# Altium PCB LM2596.PcbDoc
Units mm, origin at the board's own origin, x right, y up, seen from the top; angles counter-clockwise.
Board outline 43.5 x 27.5 mm, 2 copper layers (Top Layer, Bottom Layer), stack 1.571 mm thick; 7 components, 5 nets, 26 pads, 32 vias.
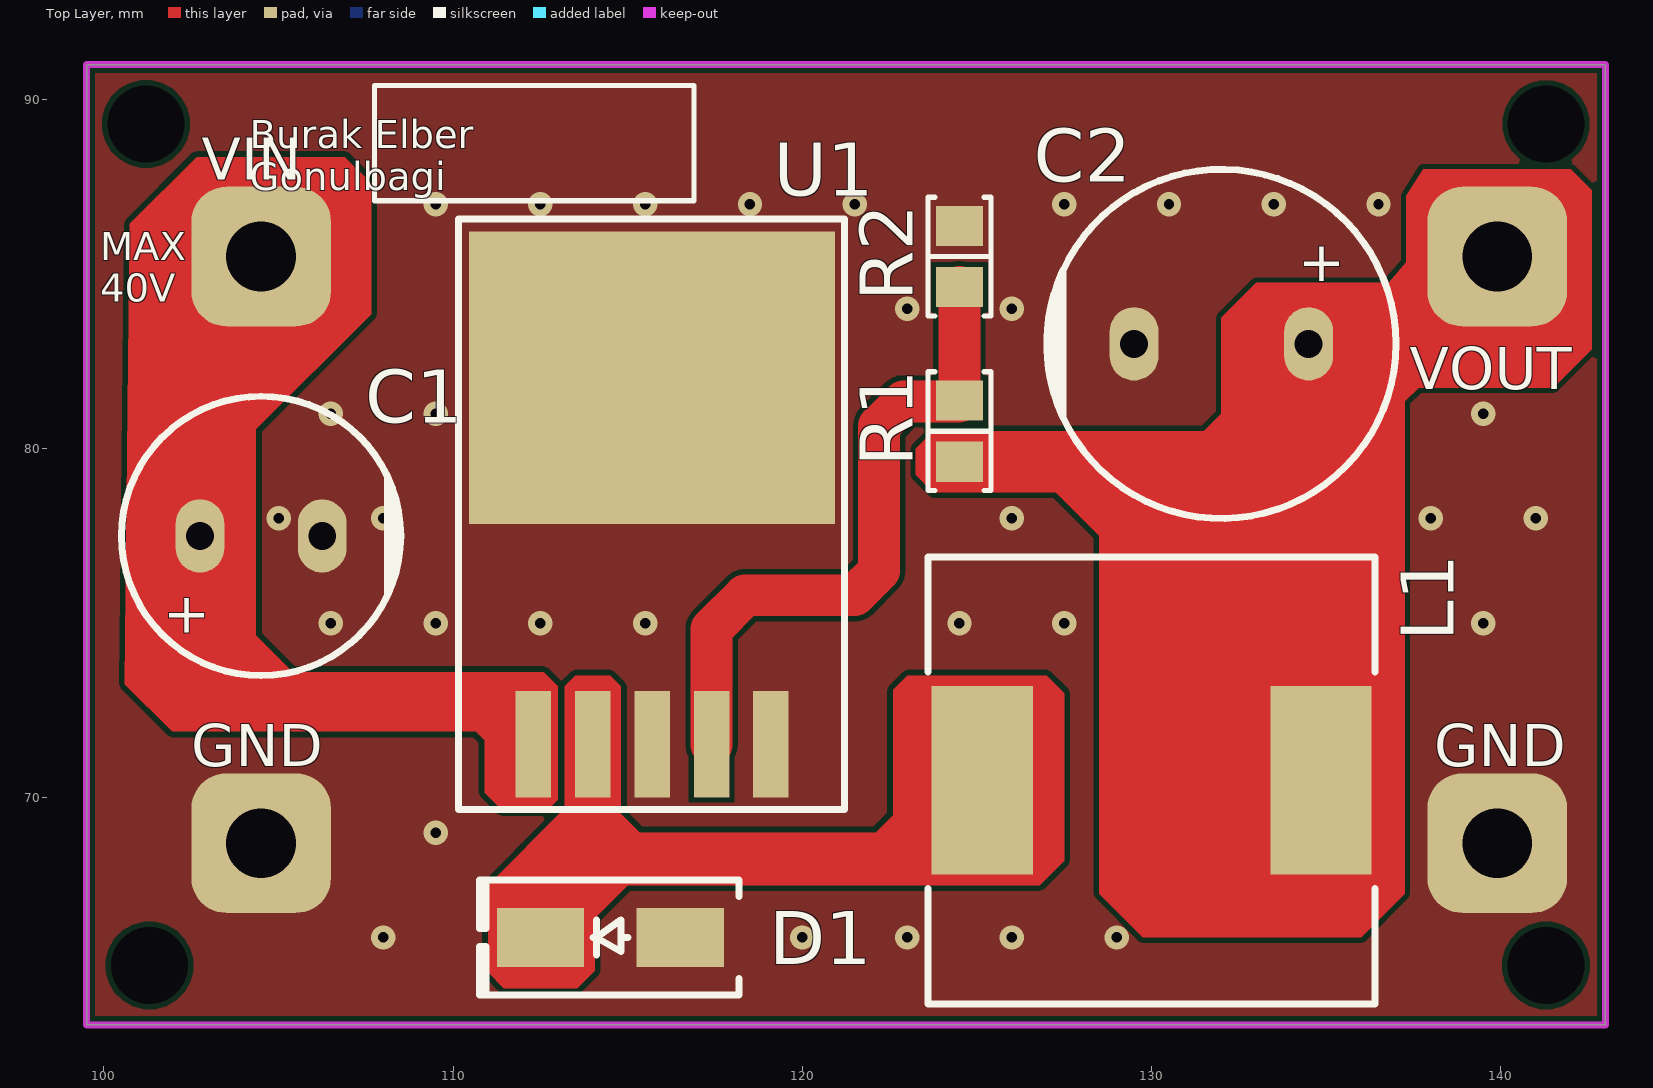
[diagram p0: Top Layer view]
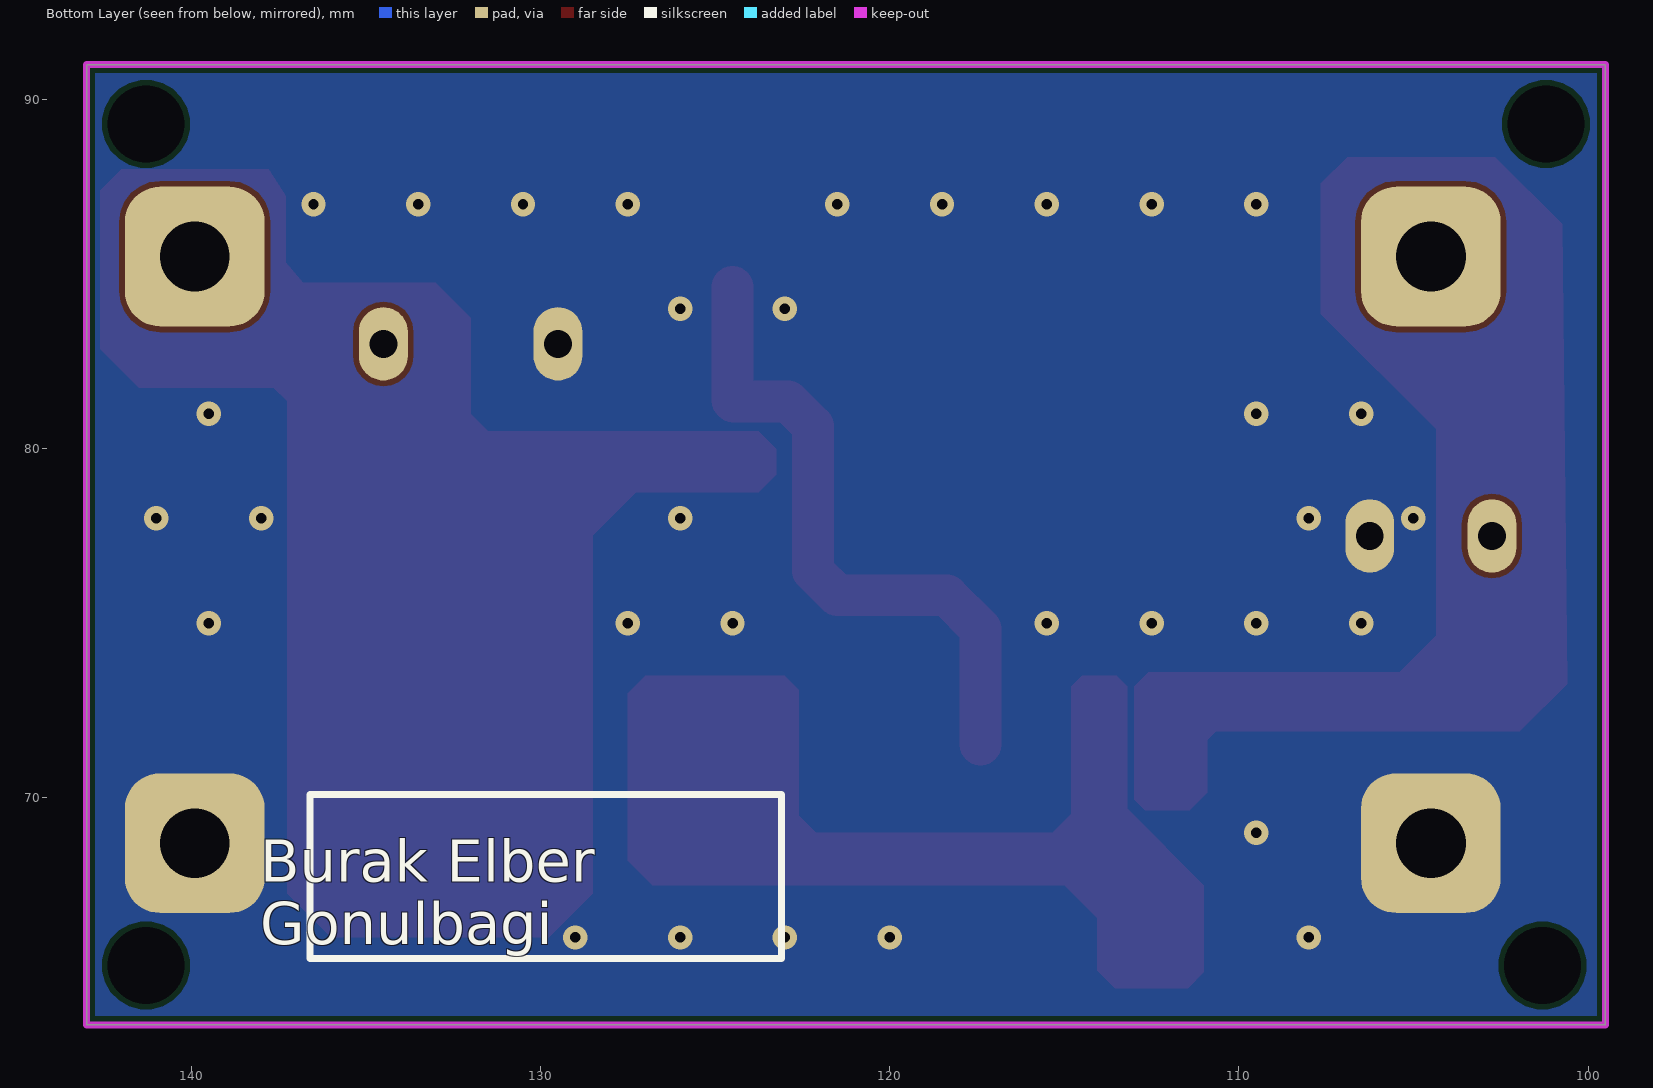
[diagram p1: Bottom Layer view, seen from below]
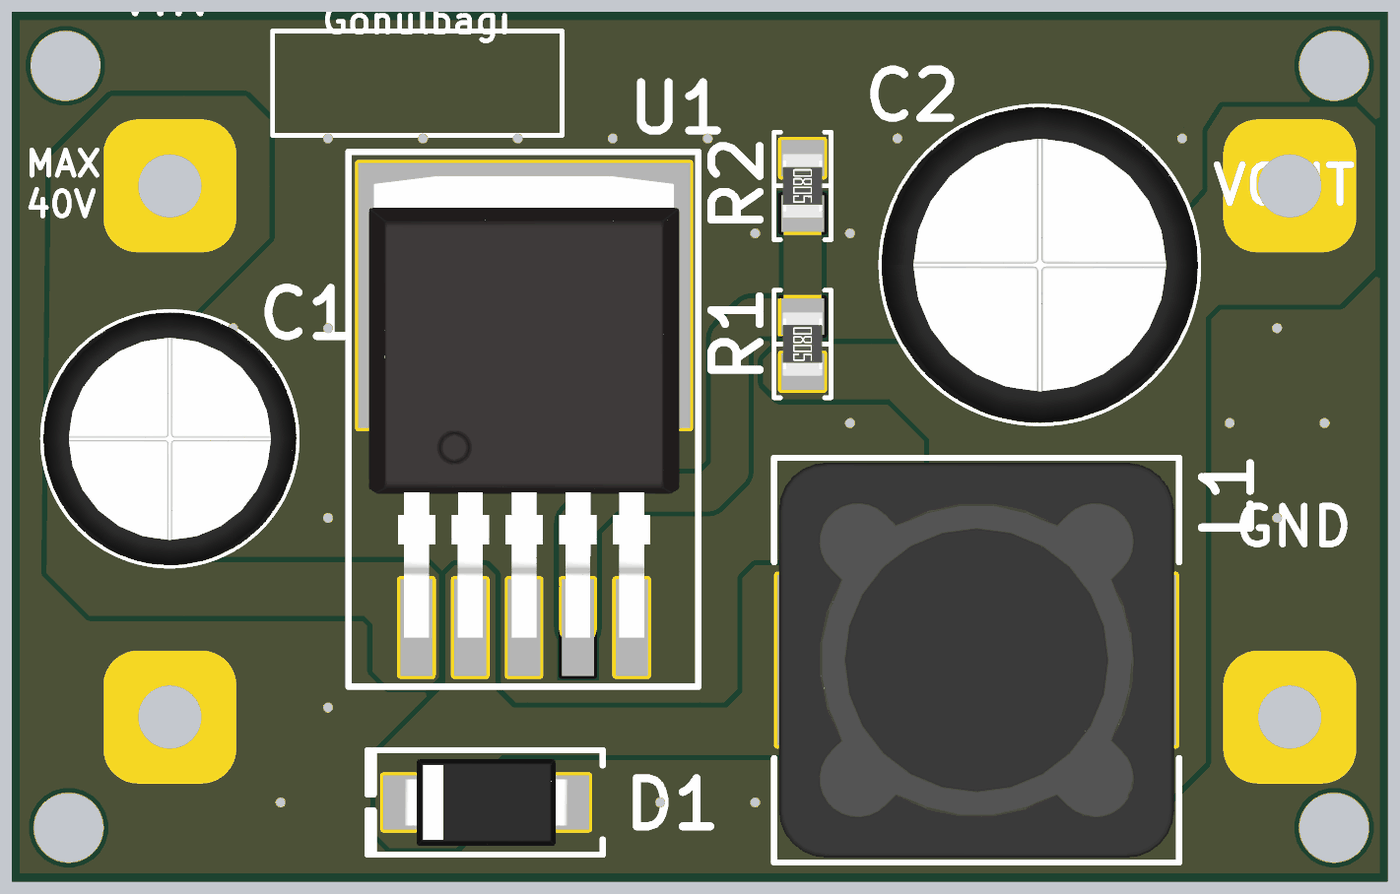
[diagram p2: 3D render of the assembled board from above, using the file's embedded part models]

## Layer stack, top to bottom
Top Solder: solder mask 0.0102, Solder Resist, Dk 3.5
Top Layer: signal copper 0.0356
Dielectric 1: dielectric 1.5, FR-4, Dk 4.8
Bottom Layer: signal copper 0.0356
Bottom Solder: solder mask 0.0102, Solder Resist, Dk 3.5

## Board outline
99.5,63.5 143,63.5 143,91 99.5,91

## Design rules (kind name [scope] priority, off if disabled: settings)
Clearance [All] p1: gap=0.152 ignorepadtopadclearanceinfootprint=FALSE
HoleSize [All] p1: absolutevalues=TRUE maxlimit=5 minlimit=0.025 maxpercent=80.000 minpercent=20.000
PolygonConnect [All] p1: connectstyle=Direct reliefconductorwidth=0.254 reliefentries=4 polygonreliefangle="90 Angle" airgapwidth=0.254
RoutingVias [All] p1: holewidth=0.711 width=1.27 viastyle="Through Hole" minholewidth=0.711 minwidth=1.27 maxholewidth=0.711 maxwidth=1.27
SolderMaskExpansion [All] p1: expansion=0.102 istentingtop=FALSE
Width [All] p1: maxlimit=2 minlimit=0.152 preferedwidth=0.5
29 further rules are at their usual default settings.

## Components (designator, comment, footprint, x,y, rotation, side; value= is the part's Value field where it differs from the comment)
C1 "100µF" "CAP TH ALUM ELEC D8.00mm S3.50mm H12.50mm" 104.5,77.5 r180 top
C2 "220µF" "CAP TH ALUM ELEC D10.00mm S5.00mm H16.00mm" 132,83 r0 top
D1 "ACDBA560-HF" "DO214AC SMA" 114.5,66 r180 top
L1 "33µH" "BOURNS SRR1280" 130,70.5 r0 top
R1 "10 kOhms" "RES 0805_2012" 124.5,80.5 r270 top
R2 "4.7 kOhms" "RES 0805_2012" 124.5,85.5 r270 top
U1 "LM2596" D2PAK 115.697,80.772 r0 top

## Footprints (in the part's own frame and the unit in brackets; to place one, negate y for a bottom-side part, rotate by r counter-clockwise, add the part's x,y. Pads: shape width x height; smd on the part's side, far side on the other; paste and mask are expansions set on the pad)
"BOURNS SRR1280" [mm] "Precision Wire Wound Inductor, 2-Leads, Body 12.50x12.50mm, IPC Medium Density"
  rect 2.9x5.4 smd: 1(-4.85,0) 2(4.85,0)
  silkscreen extent -6.4,-6.4 6.4,6.4, body extent -6.25,-6.25 6.25,6.25, height 7.9
"CAP TH ALUM ELEC D8.00mm S3.50mm H12.50mm" [mm] "8mm Diameter 3.5mm Lead Spacing Aluminum Electrolytic Capacitors Radial, Can"
  oval 1.4x2.1 hole 0.8: 1(1.75,0) 2(-1.75,0)
  silkscreen extent -4,-4 4,4, body extent -4.01,-4 4,4, height 12.5
"CAP TH ALUM ELEC D10.00mm S5.00mm H16.00mm" [mm] "10mm Diameter 5mm Lead Spacing Aluminum Electrolytic Capacitors Radial, Can"
  oval 1.4x2.1 hole 0.8: 1(2.5,0) 2(-2.5,0)
  silkscreen extent -5,-5 5,5, body extent -5.01,-5 5,5, height 16
D2PAK [mm]
  rect 1.016x3.05 smd: 1(-3.4,-9.24) 2(-1.702,-9.24) 3(0,-9.24) 4(1.702,-9.24) 5(3.404,-9.24)
  rect 10.49x8.38 smd: 3(0,1.26)
  silkscreen extent -5.55,-11.11 5.51,5.81, body extent -4.91,-9.56 4.91,5.04, height 4.22
"DO214AC SMA" [mm] "Molded Diode, 2-Leads, Body 4.30x2.60mm, IPC Medium Density"
  rect 2.5x1.7 smd: 1(-2,0) 2(2,0)
  silkscreen extent -3.68,-1.65 3.75,1.65, body extent -2.6,-1.37 2.6,1.37, height 2.4
"RES 0805_2012" [mm] "Chip Resistor, 2-Leads, Body 2.00x1.25mm, IPC Medium Density"
  rect 1.15x1.35 smd: 1(-0.875,0) 2(0.875,0)
  silkscreen extent -1.7,-0.9 1.7,0.9, body extent -1,-0.62 1,0.63, height 0.6

## Part data
C1: library part ECA-1JM101, "CAP ALUM 100UF 20% 63V RADIAL", Device Package="Radial, Can", Lifetime @ Temp.="2000 Hrs @ 85°C", manufacturer="Panasonic Electronic Components", Operating Temperature="-40°C ~ 85°C", Ripple Current @ High Frequency="459mA @ 10kHz", Ripple Current @ Low Frequency="270mA @ 120Hz", Supplier Part Number 1=P5193-ND, Tolerance=±20%, Voltage - Rated=63V, Applications="General Purpose", Capacitance=100µF, componentlink1description=Datasheet, componentlink1url=//media.digikey.com/pdf/Data%20Sheets/Panasonic%20Electronic%20Components/ECA-xxM%20Series,TypeA.pdf, componentlink2description="DigiKey Link", componentlink2url=http://digikey.com/product-detail/en/panasonic-electronic-components/ECA-1JM101/P5193-ND/245052, Height - Seated (Max)="0.492\" (12.50mm)", lastupdated="7.09.2020 05:24:51", Lead Spacing="0.138\" (3.50mm)", Lifecycle Status=Active, Minimum Order=1, Mounting Type="Through Hole", Package / Case="Radial, Can", packaging=Bulk, Part Number=ECA-1JM101, Part Status=Active, partid=7225, Polarization=Polar, price=0.37, series=M, Size / Dimension="0.315\" Dia (8.00mm)", Supplier 1=DigiKey
C2: library part UFW1J221MPD, "CAP ALUM 220UF 20% 63V RADIAL", Device Package="Radial, Can", Lifetime @ Temp.="2000 Hrs @ 85°C", manufacturer=Nichicon, Operating Temperature="-40°C ~ 85°C", Ripple Current @ Low Frequency="470mA @ 120Hz", Supplier Part Number 1=493-15152-ND, Tolerance=±20%, Voltage - Rated=63V, Applications=Audio, Capacitance=220µF, componentlink1description=Datasheet, componentlink1url=http://nichicon-us.com/english/products/pdfs/e-ufw.pdf, componentlink2description="DigiKey Link", componentlink2url=http://digikey.com/product-detail/en/nichicon/UFW1J221MPD/493-15152-ND/1964165, Height - Seated (Max)="0.630\" (16.00mm)", lastupdated="2.09.2020 01:31:17", Lead Spacing="0.197\" (5.00mm)", Lifecycle Status=Active, Minimum Order=1, Mounting Type="Through Hole", Package / Case="Radial, Can", packaging=Bulk, Part Number=UFW1J221MPD, Part Status=Active, partid=11550, Polarization=Polar, price=0.63, series=UFW, Size / Dimension="0.394\" Dia (10.00mm)", Supplier 1=DigiKey
D1: "DIODE SCHOTTKY 60V 5A DO214AC", Capacitance @ Vr, F="250pF @ 4V, 1MHz", Current - Average Rectified (Io)="5A (DC)", Current - Reverse Leakage @ Vr="500 µA @ 60 V", manufacturer="Comchip Technology", Operating Temperature - Junction="-55°C ~ 125°C", Package / Case="DO-214AC, SMA", Supplier Device Package="DO-214AC (SMA)", Supplier Part Number 1=641-2078-1-ND, Voltage - DC Reverse (Vr) (Max)="60 V", Voltage - Forward (Vf) (Max) @ If="700 mV @ 5 A", componentlink1description=Datasheet, componentlink1url=http://www.comchiptech.com/admin/files/product/ACDBA560-HF%20RevA201382.pdf, componentlink2description="DigiKey Link", componentlink2url=https://www.digikey.com/en/products/detail/comchip-technology/ACDBA560-HF/7100903, Diode Type=Schottky, lastupdated="17.03.2022 09:00:15", Lifecycle Status=Active, Minimum Order=1, Mounting Type="Surface Mount", packaging=TapeAndReel, Part Number=ACDBA560-HF, Part Status=Active, partid=1832, price=0.15, series="Automotive, AEC-Q101", Speed="Fast Recovery =< 500ns, > 200mA (Io)", Supplier 1=DigiKey
L1: library part SRR1280-330M, "FIXED IND 33UH 3.5A 57 MOHM SMD", Current - Saturation=3.3A, Current Rating (Amps)=3.5A, DC Resistance (DCR)="57mOhm Max", Device Package=Nonstandard, Frequency - Self Resonant=9.5MHz, manufacturer="Bourns Inc.", Operating Temperature="-40°C ~ 125°C", Q @ Freq="28 @ 2.52MHz", Supplier Part Number 1=SRR1280-330MCT-ND, Tolerance=±20%, Inductance Frequency - Test=100kHz, componentlink1description=Datasheet, componentlink1url=https://www.bourns.com/docs/Product-Datasheets/SRR1280.pdf, componentlink2description="DigiKey Link", componentlink2url=http://digikey.com/product-detail/en/bourns-inc/SRR1280-330M/SRR1280-330MCT-ND/2127440, Height - Seated (Max)="0.315\" (8.00mm)", lastupdated="17.03.2022 09:03:41", Lifecycle Status=Active, Material - Core=Ferrite, Minimum Order=1, Mounting Type="Surface Mount", Package / Case=Nonstandard, packaging=TapeAndReel, Part Number=SRR1280-330M, Part Status=Active, partid=25, price=0.65, series=SRR1280, Shielding=Shielded, Size / Dimension="0.492\" L x 0.492\" W (12.50mm x 12.50mm)", Supplier 1=DigiKey, Type=Wirewound, Inductance=33µH
R1: library part RNCS0805BKE10K0, "RES 10K OHM 0.1% 1/10W 0805", Device Package="0805 (2012 Metric)", manufacturer="Stackpole Electronics Inc", Operating Temperature="-55°C ~ 155°C", Power (Watts)="0.1W, 1/10W", Ratings=AEC-Q200, Supplier Device Package=0805, Supplier Part Number 1=RNCS0805BKE10K0CT-ND, Temperature Coefficient=±25ppm/°C, Tolerance=±0.1%, componentlink1description=Datasheet, componentlink1url=https://www.seielect.com/catalog/sei-rncs_rnch.pdf, componentlink2description="DigiKey Link", componentlink2url=https://www.digikey.com/en/products/detail/stackpole-electronics-inc/RNCS0805BKE10K0/1800067, Composition="Thin Film", Features="Anti-Corrosive, Automotive AEC-Q200, Moisture Resistant", Height - Seated (Max)="0.026\" (0.65mm)", lastupdated="17.03.2022 08:53:28", Lifecycle Status=Active, Minimum Order=1, Number of Terminations=2, Package / Case="0805 (2012 Metric)", packaging=TapeAndReel, Part Number=RNCS0805BKE10K0, Part Status=Active, partid=27713, price=0.09, Resistance="10 kOhms", series=RNCS, Size / Dimension="0.079\" L x 0.049\" W (2.00mm x 1.25mm)", Supplier 1=DigiKey
R2: library part RC0805FR-074K7P, "RES SMD 4.7K OHM 1% 1/8W 0805", Device Package="0805 (2012 Metric)", manufacturer=Yageo, Operating Temperature="-55°C ~ 155°C", Power (Watts)="0.125W, 1/8W", Supplier Device Package=0805, Supplier Part Number 1=YAG1325CT-ND, Temperature Coefficient=±100ppm/°C, Tolerance=±1%, componentlink1description=Datasheet, componentlink1url=http://www.yageo.com/NewPortal/yageodocoutput?fileName=/pdf/R-Chip/PYu-RC_51_RoHS_P_0.pdf, componentlink2description="DigiKey Link", componentlink2url=http://digikey.com/product-detail/en/yageo/RC0805FR-074K7P/YAG1325CT-ND/4935438, Composition="Thick Film", Features="Moisture Resistant", Height - Seated (Max)="0.024\" (0.60mm)", lastupdated="17.03.2022 08:53:27", Lifecycle Status=Active, Minimum Order=1, Number of Terminations=2, Package / Case="0805 (2012 Metric)", packaging=TapeAndReel, Part Number=RC0805FR-074K7P, Part Status=Active, partid=27895, price=0.01, Resistance="4.7 kOhms", series="RC-P Lead Free", Size / Dimension="0.079\" L x 0.049\" W (2.00mm x 1.25mm)", Supplier 1=DigiKey
U1: "LM2596DSADJG Switching Regulator 3A Adjustable; 1.23 to 37 V; 5-Pin D2PAK", Case/Package=TO-263-5, manufacturer="ON Semiconductor", Manufacturer Part Number=LM2596DSADJG, Max Operating Temperature=125°C, Max Output Current=3A, Max Output Voltage=37V, Max Input Voltage=40V, Min Operating Temperature=-40°C, Min Output Voltage=1.23V, Min Input Voltage=4.5V, Package Quantity=50, Supplier Part Number 1=LM2596DSADJGOS-ND, Switching Frequency=150kHz, Category="Voltage Regulators - Switching", componentlink1description=https://datasheet.ciiva.com/4904/lm2596-d-106251-4904961.pdf?src-supplier=Mouser, componentlink1url=https://datasheet.ciiva.com/4904/lm2596-d-106251-4904961.pdf?src-supplier=Mouser, componentlink2description=https://datasheet.ciiva.com/6605/lm2596-d-6605332.pdf?src-supplier=Digi-Key, componentlink2url=https://datasheet.ciiva.com/6605/lm2596-d-6605332.pdf?src-supplier=Digi-Key, Contact Plating=Tin,Matte, Designed by=Burak, Efficiency=73%, Halogen Free="Halogen Free", Height=9.347mm, Lead Free="Lead Free", Length=10.24mm, Mount="Surface Mount", Number of Outputs=1, Number of Pins=5, Operating Supply Voltage=40V, Output Current=3A, Output Type=Adjustable, Output Voltage=37V, packaging=Rail/Tube, Pricing 1="1=2,49000, 10=2,23700, 25=2,11000, 100=1,79790, 250=1,68816, 500=1,47714, 1000=1,39352 (USD)", Radiation Hardening=No, REACH SVHC="No SVHC", RoHS=Yes, RoHS Compliant=Yes, series=LM2596, Supplier 1=Digi-Key, Synchronous Rectifier=No, Weight=0.070548oz, Width=4.572mm

## Free pads (board coordinates)
  rrect50% 0x0 hole 2.2: GND(101.2,89.3) GND1(101.3,65.2) GND1(141.3,65.2) GND1(141.3,89.3)
  rrect50% 4x4 hole 2: GND(104.5,68.7) GND(139.9,68.7) VIN(104.5,85.5) VOUT(139.9,85.5)

## Via types
v1: diameter 0.7, hole 0.3, Top Layer to Bottom Layer, tented both sides, 32 vias

## Nets (pads, with @x,y where several pads share a name; then routed paths per layer and width w, separated by ;. In a path a pad name is that pad's centre, name@x,y a point inside that pad or via, vN(x,y) a via of type N, cw(c..) or ccw(c..) an arc to the next point about the centre after c; other vN are vias at no path point)
+12: C2.1 L1.2 pad.VOUT R1.2
Feedback: R1.1 R2.2 U1.4 | length 18.8
  Top Layer w1.2: U1.4 117.399,74.837 118.362,75.8 121.497,75.8 122.2,76.503 122.2,80.647 122.903,81.35 124.475,81.35 R1.1 R2.2
GND: C1.2 C2.2 D1.1 pad.GND@104.5,68.7 pad.GND@139.9,68.7 R2.1 U1.3 U1.5
  other v1: 108,66 120,66 123,66 126,66 129,66 109.5,69 106.5,75 109.5,75 112.5,75 115.5,75 124.5,75 127.5,75 139.5,75 105,78 108,78 126,78 138,78 141,78 106.5,81 109.5,81 139.5,81 123,84 126,84 109.5,87 112.5,87 115.5,87 118.5,87 121.5,87 127.5,87 130.5,87 133.5,87 136.5,87
NetD1_2: D1.2 L1.1 U1.2
VCC: C1.1 pad.VIN U1.1

## Polygon pours and split planes (outlines as drawn)
GND on Bottom Layer "GND_L02_P000" (solid, pour order 0): 99.6,90.8 142.9,90.8 142.9,63.5 99.6,63.5
GND on Top Layer "GND_L01_P001" (solid, pour order 1): 99.6,90.9 142.9,90.9 142.9,63.6 99.6,63.6

## Keep-outs
Keep-Out Layer:
  the board outline again, w0.2

## Other copper
Top Layer:
  region net VCC: 100.742,86.442 102.65,88.35 106.9,88.35 107.65,87.6 107.65,83.85 104.35,80.55 104.35,74.65 105.4,73.6 112.6,73.6 113,73.2 113,69.95 112.7,69.65 111.4,69.65 110.9,70.15 110.9,71.65 110.65,71.9 101.95,71.9 100.6,73.25
  region net +12: 123.25,79.25 123.75,78.75 127.25,78.75 128.5,77.5 128.5,67.25 129.75,66 136,66 137.25,67.25 137.25,81.35 137.65,81.75 141.5,81.75 142.6,82.85 142.6,87.4 142,88 137.781,88 137.3,87.242 137.3,85.337 136.789,84.75 133,84.75 132,83.75 132,81 131.5,80.5 123.75,80.5 123.25,80
  region net NetD1_2: 114.5,73.5 113.5,73.5 113.2,73.2 113.2,69.7 111,67.5 111,65 111.45,64.55 113.55,64.55 114.05,65.05 114.05,66.55 115,67.5 126.8,67.5 127.5,68.2 127.5,73 127,73.5 123,73.5 122.6,73.1 122.6,69.5 122.1,69 115.35,69 114.8,69.55 114.8,73.2

## Silkscreen, mask and mechanical layers (free items; w line width, h text height)
Top Overlay:
  lines w0.15: 107.75,87.1 116.9,87.1 116.9,90.4 107.75,90.4 107.75,87.1
  text "VIN" at 102.8,87.7 h1.2
  text "Burak Elber / Gonulbagi" at 104.175,87.4 h0.8
  text "MAX / 40V" at 99.9,84.2 h0.8
  text "VOUT" at 137.4,81.7 h1.2
  text "GND" at 102.5,70.9 h1.2
  text "GND" at 138.1,70.9 h1.2
Bottom Overlay:
  lines w0.2: 123.1,65.4 136.6,65.4 136.6,70.1 123.1,70.1 123.1,65.4
  text "Burak Elber / Gonulbagi" at 138.025,65.8 h1.2

## Text inside footprints (layer, text, board x,y; h text height)
C1: Top Overlay "+" at 103.05,76.1 h2 r180
C2: Top Overlay "+" at 134.2,84.4 h2